# EAGLE board Lilypad_Arduino_USB-Panel-v12 (EAGLE 6.5.0)
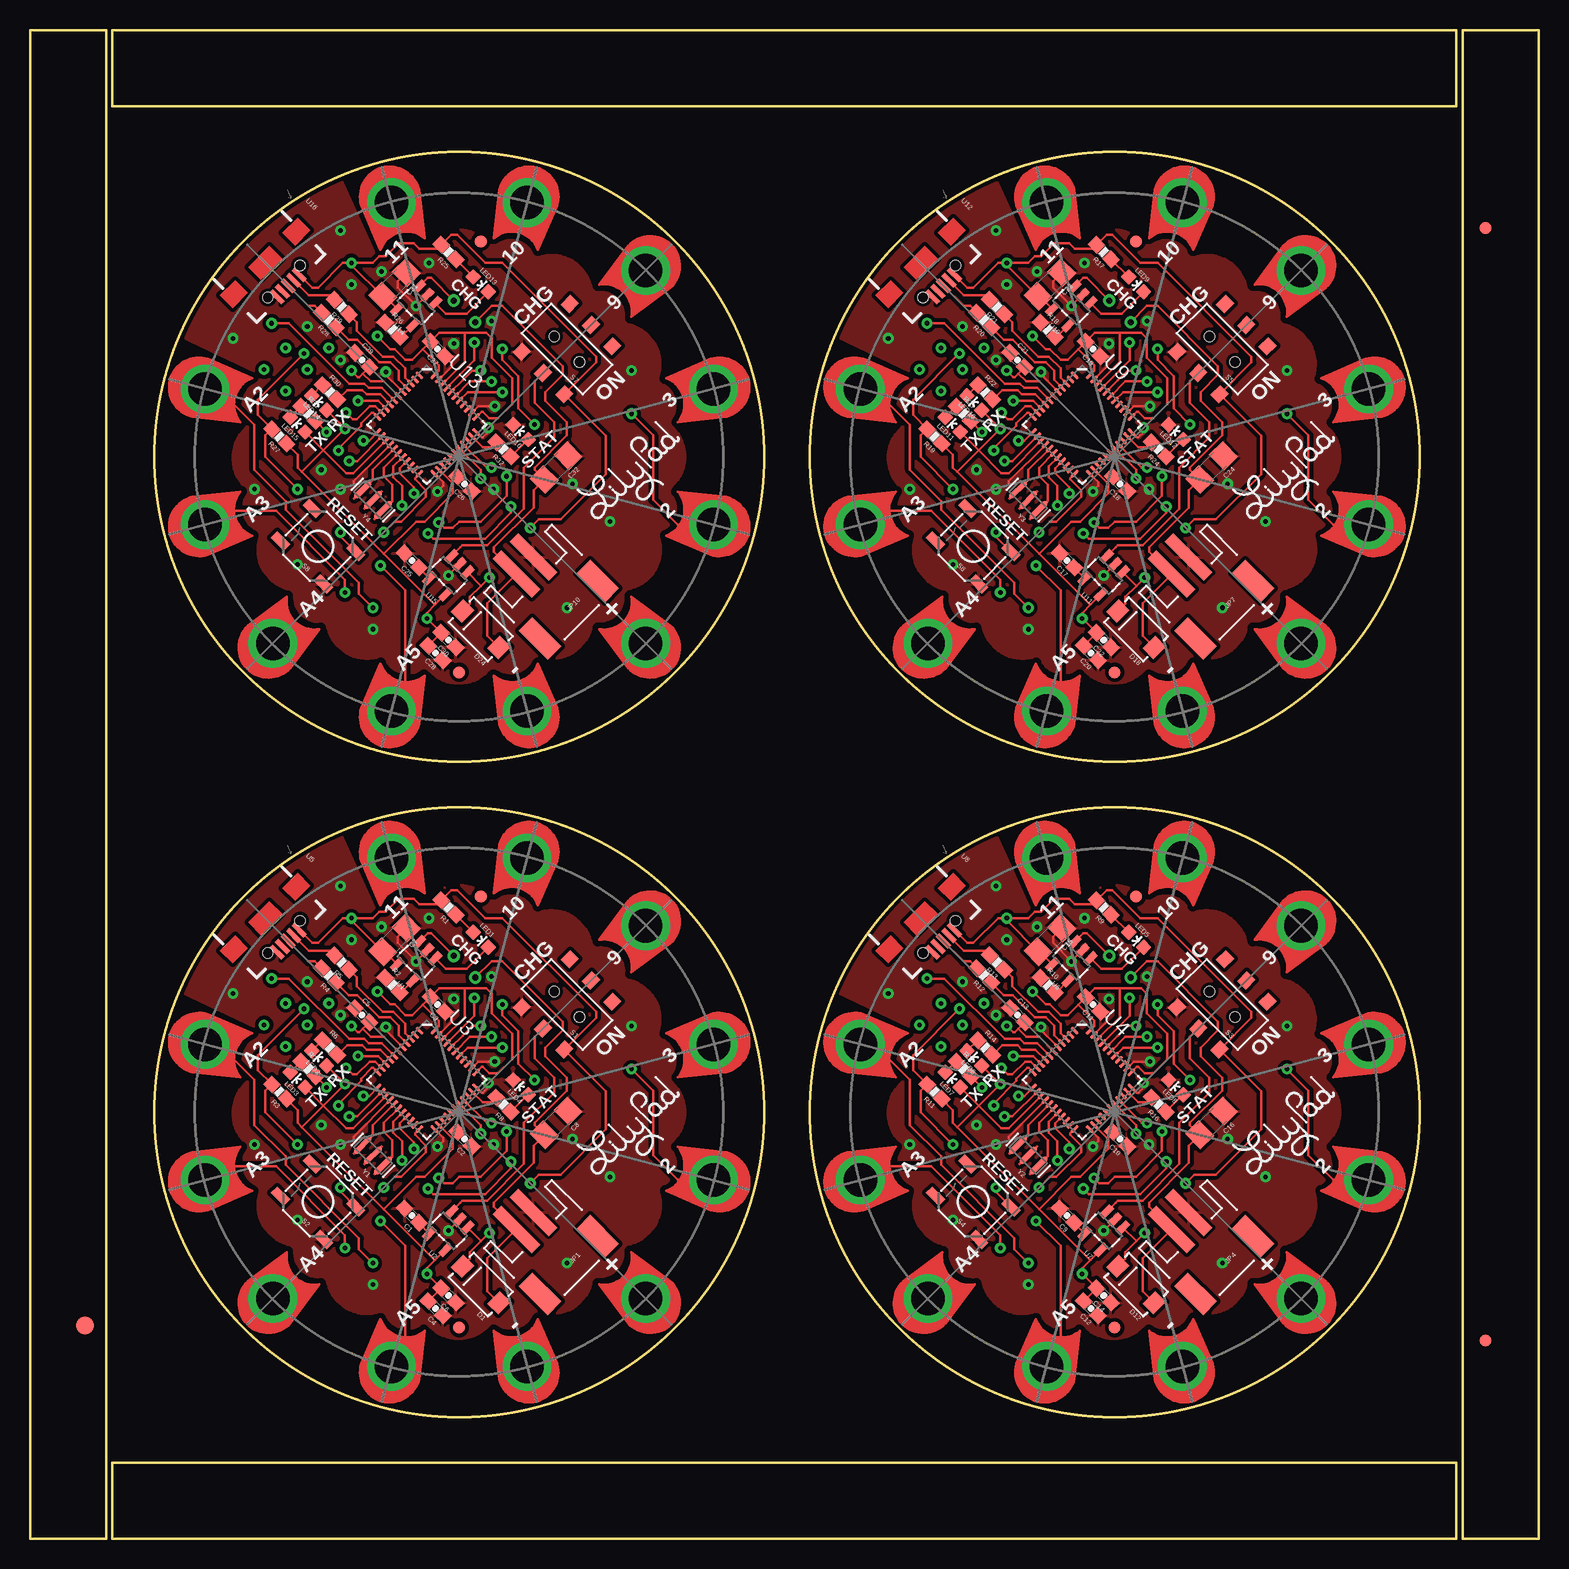
[diagram p0: board, top side]
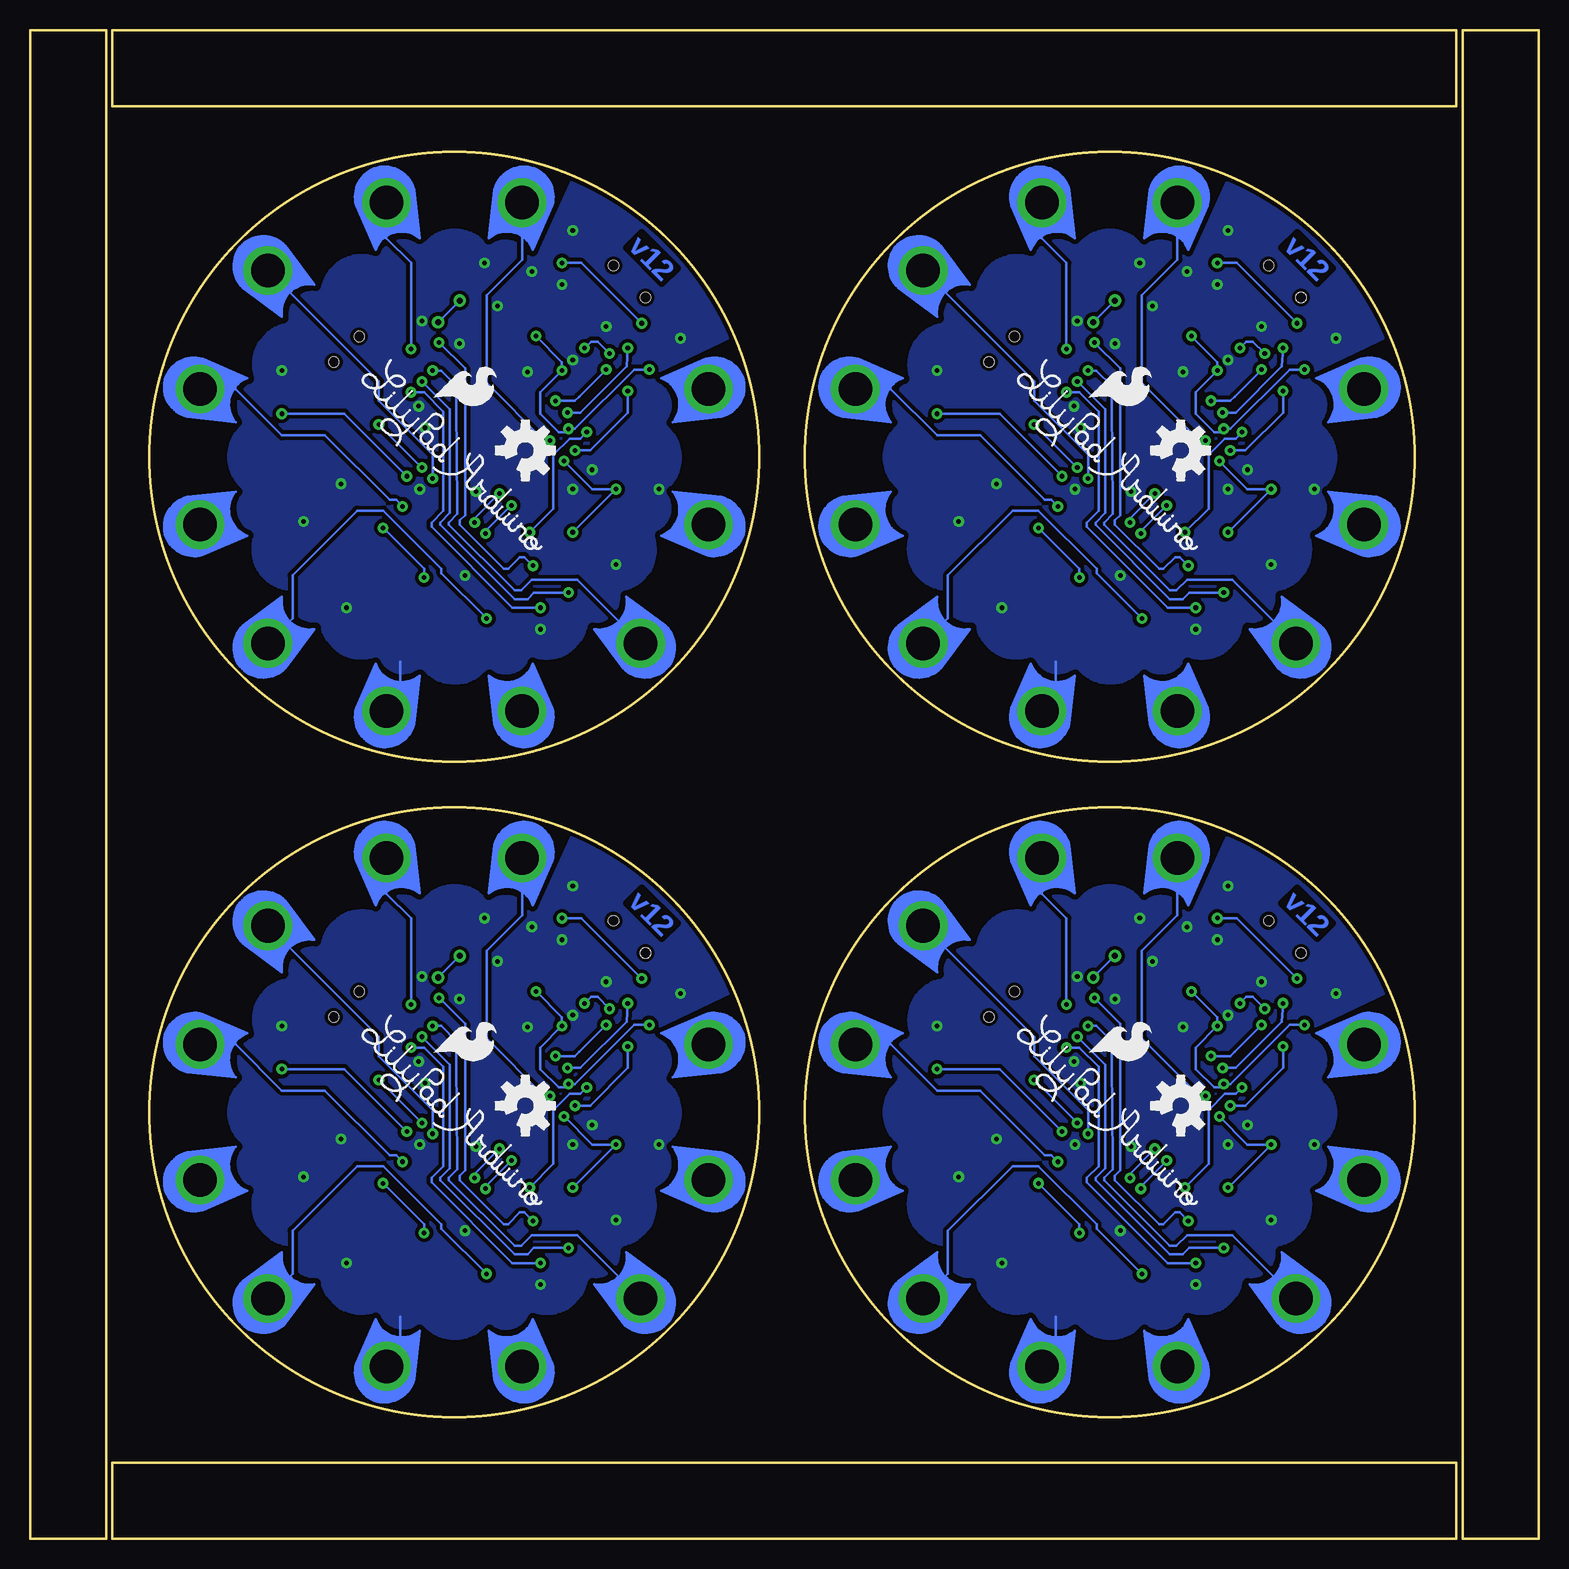
[diagram p1: board, bottom side, seen from below]

Size 125.73 x 125.73 mm. Coordinates in mm from the lower left corner, seen from the top.
Outline: 6.35,0 6.35,125.73 0,125.73 0,0 6.35,0
Outline: 6.86,0 118.87,0 118.87,6.35 6.86,6.35 6.86,0
Outline: 125.73,0 125.73,125.73 119.38,125.73 119.38,0 125.73,0
Outline: 118.87,125.73 6.86,125.73 6.86,119.38 118.87,119.38 118.87,125.73
Outline: circle at 35.77,35.55 radius 25.4
Outline: circle at 90.38,35.55 radius 25.4
Outline: circle at 90.38,90.16 radius 25.4
Outline: circle at 35.77,90.16 radius 25.4
Copper layers (1*16): Top 0.035mm / dielectric 1.5mm / Bottom 0.035mm
Design rules "SparkFun-2-layer": minimum track width 7mil, minimum drill 15mil, track to track 8mil, track to pad 8mil, pad to pad 8mil, via to via 8mil, smd to smd 8mil, copper to edge 8mil, drill to drill 8mil, minimum pad ring 12mil, minimum via ring 10mil, stop-mask expansion 4mil, vias tented up to drill 20mil, thermal gap 10mil
tRestrict: area 10.7,26.1 to 18.6,32.7; area 52.9,38.4 to 60.9,45; area 15.7,15.6 to 24.2,24; area 47.4,47.1 to 55.8,55.5; area 52.9,26 to 60.9,32.6; area 38.7,52.7 to 45.4,60.6; area 26.2,10.5 to 32.9,18.4; area 10.7,38.5 to 18.6,45.1; area 26.3,52.7 to 32.9,60.6; area 38.6,10.5 to 45.2,18.4; area 12.3,20 to 21.5,29; area 10.3,32 to 17.6,39; 84 more areas
bRestrict: area 15.7,15.6 to 24.2,24; area 47.4,47.1 to 55.8,55.5; area 52.9,26 to 60.9,32.6; area 38.7,52.7 to 45.4,60.6; area 26.2,10.5 to 32.9,18.4; area 10.7,38.5 to 18.6,45.1; area 26.3,52.7 to 32.9,60.6; area 38.6,10.5 to 45.2,18.4; area 12.3,20 to 21.5,29; area 10.3,32 to 17.6,39; area 42.3,49.8 to 51.3,59; area 32.3,53.7 to 39.3,61; 72 more areas

## Footprints (pad centres in the part's own frame; a part is rotated, then mirrored left to right if it is on the bottom)
PETAL-LONG-1-2SIDE = drill 2.794 pad 4.064: 1 0.03,0
0603-CAP = smd 1.1 x 1: 1 -0.85,0; 2 0.85,0
1206 = smd 1.6 x 1.8: 1 -1.4,0; 2 1.4,0
SMA-DIODE = smd 1.27 x 1.47: A -2.15,0; C 2.15,0
FIDUCIAL-1.5X3 = smd 1.5 x 1.5: 1 0,0
FIDUCIAL-1X2 = smd 1 x 1: 1 0,0
JST-2-SMD = smd 1 x 4.6: 1 -1,-3.7; 2 1,-3.7 | smd 1.6 x 3.4: NC1 -3.4,1.5; NC2 3.4,1.5
LED-0603 = smd 1 x 1: A 0,-0.877; C 0,0.877
0603-RES = smd 1.1 x 1: 1 -0.85,0; 2 0.85,0
AYZ0202 = smd 1 x 1.15: 1 -2.5,2.825; 2 0,2.825; 3 2.5,2.825; 4 -2.5,-2.825; 5 0,-2.825; 6 2.5,-2.825 | hole 0.85: 1.5,0; -1.5,0
TACTILE_SWITCH_SMD = smd 1.524 x 0.762: 1 -2.54,1.905; 2 2.54,1.905; 3 -2.54,-1.905; 4 2.54,-1.905
SOT23-5 = smd 0.55 x 1.2: 1 -0.95,-1.3; 2 0,-1.3; 3 0.95,-1.3; 4 0.95,1.3; 5 -0.95,1.3
QFN-44-NOPAD_1:1-LESS_PASTE = smd 0.8 x 0.3: 1 -3.337,2.458; 2 -3.337,1.958; 3 -3.337,1.479; 4 -3.337,0.979; 5 -3.337,0.5; 6 -3.337,0; 7 -3.337,-0.5; 8 -3.337,-0.979; 9 -3.337,-1.479; 10 -3.337,-1.958; 11 -3.337,-2.458; 23 3.337,-2.458; 24 3.337,-1.958; 25 3.337,-1.479; 26 3.337,-0.979; 27 3.337,-0.5; 28 3.337,0; 29 3.337,0.5; 30 3.337,0.979; 31 3.337,1.479; 32 3.337,1.958; 33 3.337,2.458 | smd 0.3 x 0.8: 12 -2.458,-3.337; 13 -1.958,-3.337; 14 -1.479,-3.337; 15 -0.979,-3.337; 16 -0.5,-3.337; 17 0,-3.337; 18 0.5,-3.337; 19 0.979,-3.337; 20 1.479,-3.337; 21 1.958,-3.337; 22 2.458,-3.337; 34 2.458,3.337; 35 1.958,3.337; 36 1.479,3.337; 37 0.979,3.337; 38 0.5,3.337; 39 0,3.337; 40 -0.5,3.337; 41 -0.979,3.337; 42 -1.479,3.337; 43 -1.958,3.337; 44 -2.458,3.337
USB-AB-MICRO-SMD_V03 = smd 1.4 x 0.4: D+1 2.7,0; D-1 2.7,0.65; GND1 2.7,-1.3; ID1 2.7,-0.65; VBUS1 2.7,1.3 | hole 0.85: 2.2,1.9; 2.2,-1.9
RESONATOR-SMD = smd 0.45 x 1.905: 1 -1.2,0; 2 0,0; 3 1.2,0

## Placement (x,y rotation side)
+  SEWTAP9  [PETAL-LONG-1-2SIDE]  51.32,19.99 135 top
+1  SEWTAP9  [PETAL-LONG-1-2SIDE]  105.93,19.99 135 top
+2  SEWTAP9  [PETAL-LONG-1-2SIDE]  105.93,74.6 135 top
+3  SEWTAP9  [PETAL-LONG-1-2SIDE]  51.32,74.6 135 top
-  SEWTAP9  [PETAL-LONG-1-2SIDE]  41.42,14.34 105 top
-1  SEWTAP9  [PETAL-LONG-1-2SIDE]  96.03,14.34 105 top
-2  SEWTAP9  [PETAL-LONG-1-2SIDE]  96.03,68.95 105 top
-3  SEWTAP9  [PETAL-LONG-1-2SIDE]  41.42,68.95 105 top
A1  SEWTAP9  [PETAL-LONG-1-2SIDE]  69.16,41.21 345 top
A2  SEWTAP9  [PETAL-LONG-1-2SIDE]  14.55,41.21 345 top
A3  SEWTAP9  [PETAL-LONG-1-2SIDE]  14.55,29.89 15 top
A4  SEWTAP9  [PETAL-LONG-1-2SIDE]  20.21,19.99 45 top
A5  SEWTAP9  [PETAL-LONG-1-2SIDE]  30.11,14.34 75 top
A6  SEWTAP9  [PETAL-LONG-1-2SIDE]  69.16,29.89 15 top
A7  SEWTAP9  [PETAL-LONG-1-2SIDE]  84.72,14.34 75 top
A8  SEWTAP9  [PETAL-LONG-1-2SIDE]  74.82,19.99 45 top
A9  SEWTAP9  [PETAL-LONG-1-2SIDE]  69.16,95.82 345 top
A10  SEWTAP9  [PETAL-LONG-1-2SIDE]  69.16,84.5 15 top
A11  SEWTAP9  [PETAL-LONG-1-2SIDE]  84.72,68.95 75 top
A12  SEWTAP9  [PETAL-LONG-1-2SIDE]  74.82,74.6 45 top
A13  SEWTAP9  [PETAL-LONG-1-2SIDE]  14.55,95.82 345 top
A14  SEWTAP9  [PETAL-LONG-1-2SIDE]  14.55,84.5 15 top
A15  SEWTAP9  [PETAL-LONG-1-2SIDE]  30.11,68.95 75 top
A16  SEWTAP9  [PETAL-LONG-1-2SIDE]  20.21,74.6 45 top
C1  470pF  [0603-CAP]  31.82,26.93 135 top
C2  .1uF  [0603-CAP]  36.22,33.3 135 top
C3  .1uF  [0603-CAP]  33.97,44.53 135 top
C4  .1uF  [0603-CAP]  33.79,19.2 135 top
C5  1uF  [0603-CAP]  27.68,43.63 315 top
C6  4.7uF  [0603-CAP]  34.87,20.28 135 top
C7  4.7uF  [1206]  30.38,49.92 225 top
C8  4.7uF  [1206]  43.85,34.65 225 top
C9  470pF  [0603-CAP]  86.43,26.93 135 top
C10  .1uF  [0603-CAP]  90.83,33.3 135 top
C11  .1uF  [0603-CAP]  88.58,44.53 135 top
C12  .1uF  [0603-CAP]  88.4,19.2 135 top
C13  1uF  [0603-CAP]  82.29,43.63 315 top
C14  4.7uF  [0603-CAP]  89.48,20.28 135 top
C15  4.7uF  [1206]  84.99,49.92 225 top
C16  4.7uF  [1206]  98.46,34.65 225 top
C17  470pF  [0603-CAP]  86.43,81.54 135 top
C18  .1uF  [0603-CAP]  90.83,87.91 135 top
C19  .1uF  [0603-CAP]  88.58,99.14 135 top
C20  .1uF  [0603-CAP]  88.4,73.81 135 top
C21  1uF  [0603-CAP]  82.29,98.24 315 top
C22  4.7uF  [0603-CAP]  89.48,74.89 135 top
C23  4.7uF  [1206]  84.99,104.53 225 top
C24  4.7uF  [1206]  98.46,89.26 225 top
C25  470pF  [0603-CAP]  31.82,81.54 135 top
C26  .1uF  [0603-CAP]  36.22,87.91 135 top
C27  .1uF  [0603-CAP]  33.97,99.14 135 top
C28  .1uF  [0603-CAP]  33.79,73.81 135 top
C29  1uF  [0603-CAP]  27.68,98.24 315 top
C30  4.7uF  [0603-CAP]  34.87,74.89 135 top
C31  4.7uF  [1206]  30.38,104.53 225 top
C32  4.7uF  [1206]  43.85,89.26 225 top
D1  B340A  [SMA-DIODE]  37.56,21.18 135 top
D2  SEWTAP9  [PETAL-LONG-1-2SIDE]  111.59,29.89 165 top
D3  SEWTAP9  [PETAL-LONG-1-2SIDE]  105.93,51.11 225 top
D4  SEWTAP9  [PETAL-LONG-1-2SIDE]  111.59,41.21 195 top
D5  SEWTAP9  [PETAL-LONG-1-2SIDE]  56.98,29.89 165 top
D6  SEWTAP9  [PETAL-LONG-1-2SIDE]  56.98,41.21 195 top
D7  SEWTAP9  [PETAL-LONG-1-2SIDE]  96.03,56.76 255 top
D8  SEWTAP9  [PETAL-LONG-1-2SIDE]  84.72,56.76 285 top
D9  SEWTAP9  [PETAL-LONG-1-2SIDE]  51.32,51.11 225 top
D10  SEWTAP9  [PETAL-LONG-1-2SIDE]  41.42,56.76 255 top
D11  SEWTAP9  [PETAL-LONG-1-2SIDE]  30.11,56.76 285 top
D12  B340A  [SMA-DIODE]  92.17,21.18 135 top
D13  SEWTAP9  [PETAL-LONG-1-2SIDE]  111.59,84.5 165 top
D14  SEWTAP9  [PETAL-LONG-1-2SIDE]  105.93,105.72 225 top
D15  SEWTAP9  [PETAL-LONG-1-2SIDE]  111.59,95.82 195 top
D16  SEWTAP9  [PETAL-LONG-1-2SIDE]  96.03,111.37 255 top
D17  SEWTAP9  [PETAL-LONG-1-2SIDE]  84.72,111.37 285 top
D18  B340A  [SMA-DIODE]  92.17,75.79 135 top
D19  SEWTAP9  [PETAL-LONG-1-2SIDE]  56.98,84.5 165 top
D20  SEWTAP9  [PETAL-LONG-1-2SIDE]  51.32,105.72 225 top
D21  SEWTAP9  [PETAL-LONG-1-2SIDE]  56.98,95.82 195 top
D22  SEWTAP9  [PETAL-LONG-1-2SIDE]  41.42,111.37 255 top
D23  SEWTAP9  [PETAL-LONG-1-2SIDE]  30.11,111.37 285 top
D24  B340A  [SMA-DIODE]  37.56,75.79 135 top
E$1  [FIDUCIAL-1.5X3]  4.57,17.78 0 top
E$3  [FIDUCIAL-1X2]  121.28,16.51 0 top
E$5  [FIDUCIAL-1X2]  121.28,109.22 180 top
JP1  JST-2  [JST-2-SMD]  43.85,23.87 225 top
JP2  FIDUCIAL1X2  [FIDUCIAL-1X2]  35.77,17.59 45 top
JP3  FIDUCIAL1X2  [FIDUCIAL-1X2]  37.56,53.51 45 top
JP4  JST-2  [JST-2-SMD]  98.46,23.87 225 top
JP5  FIDUCIAL1X2  [FIDUCIAL-1X2]  90.38,17.59 45 top
JP6  FIDUCIAL1X2  [FIDUCIAL-1X2]  92.17,53.51 45 top
JP7  JST-2  [JST-2-SMD]  98.46,78.48 225 top
JP8  FIDUCIAL1X2  [FIDUCIAL-1X2]  90.38,72.2 45 top
JP9  FIDUCIAL1X2  [FIDUCIAL-1X2]  92.17,108.12 45 top
JP10  JST-2  [JST-2-SMD]  43.85,78.48 225 top
JP11  FIDUCIAL1X2  [FIDUCIAL-1X2]  35.77,72.2 45 top
JP12  FIDUCIAL1X2  [FIDUCIAL-1X2]  37.56,108.12 45 top
LED1  RED  [LED-0603]  37.56,49.92 225 top
LED2  RED  [LED-0603]  24.09,40.04 45 top
LED3  RED  [LED-0603]  22.3,38.24 45 top
LED4  RED  [LED-0603]  40.89,37.61 45 top
LED5  RED  [LED-0603]  92.17,49.92 225 top
LED6  RED  [LED-0603]  78.7,40.04 45 top
LED7  RED  [LED-0603]  76.91,38.24 45 top
LED8  RED  [LED-0603]  95.5,37.61 45 top
LED9  RED  [LED-0603]  92.17,104.53 225 top
LED10  RED  [LED-0603]  78.7,94.65 45 top
LED11  RED  [LED-0603]  76.91,92.85 45 top
LED12  RED  [LED-0603]  95.5,92.22 45 top
LED13  RED  [LED-0603]  37.56,104.53 225 top
LED14  RED  [LED-0603]  24.09,94.65 45 top
LED15  RED  [LED-0603]  22.3,92.85 45 top
LED16  RED  [LED-0603]  40.89,92.22 45 top
R1  330  [0603-RES]  34.87,52.61 135 top
R2  10k  [0603-RES]  30.2,46.15 315 top
R3  10k  [0603-RES]  20.77,37.26 135 top
R4  22  [0603-RES]  24.9,46.95 135 top
R5  22  [0603-RES]  25.98,48.03 135 top
R6  330  [0603-RES]  24.99,40.94 315 top
R7  330  [0603-RES]  23.19,39.14 315 top
R8  330  [0603-RES]  39.45,36.18 135 top
R9  330  [0603-RES]  89.48,52.61 135 top
R10  10k  [0603-RES]  84.81,46.15 315 top
R11  10k  [0603-RES]  75.38,37.26 135 top
R12  22  [0603-RES]  79.51,46.95 135 top
R13  22  [0603-RES]  80.59,48.03 135 top
R14  330  [0603-RES]  79.6,40.94 315 top
R15  330  [0603-RES]  77.8,39.14 315 top
R16  330  [0603-RES]  94.06,36.18 135 top
R17  330  [0603-RES]  89.48,107.22 135 top
R18  10k  [0603-RES]  84.81,100.76 315 top
R19  10k  [0603-RES]  75.38,91.87 135 top
R20  22  [0603-RES]  79.51,101.56 135 top
R21  22  [0603-RES]  80.59,102.64 135 top
R22  330  [0603-RES]  79.6,95.55 315 top
R23  330  [0603-RES]  77.8,93.75 315 top
R24  330  [0603-RES]  94.06,90.79 135 top
R25  330  [0603-RES]  34.87,107.22 135 top
R26  10k  [0603-RES]  30.2,100.76 315 top
R27  10k  [0603-RES]  20.77,91.87 135 top
R28  22  [0603-RES]  24.9,101.56 135 top
R29  22  [0603-RES]  25.98,102.64 135 top
R30  330  [0603-RES]  24.99,95.55 315 top
R31  330  [0603-RES]  23.19,93.75 315 top
R32  330  [0603-RES]  39.45,90.79 135 top
S1  [AYZ0202]  44.75,44.53 135 top
S2  !RESET  [TACTILE_SWITCH_SMD]  24,28.1 135 top
S3  [AYZ0202]  99.36,44.53 135 top
S4  !RESET  [TACTILE_SWITCH_SMD]  78.61,28.1 135 top
S5  [AYZ0202]  99.36,99.14 135 top
S6  !RESET  [TACTILE_SWITCH_SMD]  78.61,82.71 135 top
S7  [AYZ0202]  44.75,99.14 135 top
S8  !RESET  [TACTILE_SWITCH_SMD]  24,82.71 135 top
U1  MCP73831  [SOT23-5]  32.17,48.12 135 top
U2  MIC5219  [SOT23-5]  34.87,25.67 135 top
U3  ATMEGA32U41:1-LESS_PASTE  [QFN-44-NOPAD_1:1-LESS_PASTE]  33.07,38.24 315 top
U4  ATMEGA32U41:1-LESS_PASTE  [QFN-44-NOPAD_1:1-LESS_PASTE]  87.68,38.24 315 top
U5  [USB-AB-MICRO-SMD_V03]  19.6,51.71 315 top
U6  MCP73831  [SOT23-5]  86.78,48.12 135 top
U7  MIC5219  [SOT23-5]  89.48,25.67 135 top
U8  [USB-AB-MICRO-SMD_V03]  74.21,51.71 315 top
U9  ATMEGA32U41:1-LESS_PASTE  [QFN-44-NOPAD_1:1-LESS_PASTE]  87.68,92.85 315 top
U10  MCP73831  [SOT23-5]  86.78,102.73 135 top
U11  MIC5219  [SOT23-5]  89.48,80.28 135 top
U12  [USB-AB-MICRO-SMD_V03]  74.21,106.32 315 top
U13  ATMEGA32U41:1-LESS_PASTE  [QFN-44-NOPAD_1:1-LESS_PASTE]  33.07,92.85 315 top
U14  MCP73831  [SOT23-5]  32.17,102.73 135 top
U15  MIC5219  [SOT23-5]  34.87,80.28 135 top
U16  [USB-AB-MICRO-SMD_V03]  19.6,106.32 315 top
U$1  LOGO-LPLPA  [LOGO-LPA]  35.77,35.55 315 bottom
U$2  LOGO-LPLP  [LOGO-LILYPAD]  104.66,34.38 45 top
U$3  LOGO-LPLPA  [LOGO-LPA]  90.38,35.55 315 bottom
U$4  OSHW-LOGOM  [OSHW-LOGO-M]  84.45,36.09 315 bottom
U$5  OSHW-LOGOM  [OSHW-LOGO-M]  29.84,36.09 315 bottom
U$6  [SFE_LOGO_FLAME_.2]  92.53,40.58 315 bottom
U$7  [SFE_LOGO_FLAME_.2]  37.92,40.58 315 bottom
U$8  LOGO-LPLP  [LOGO-LILYPAD]  104.66,88.99 45 top
U$9  LOGO-LPLPA  [LOGO-LPA]  90.38,90.16 315 bottom
U$10  OSHW-LOGOM  [OSHW-LOGO-M]  84.45,90.7 315 bottom
U$11  [SFE_LOGO_FLAME_.2]  92.53,95.19 315 bottom
U$12  LOGO-LPLP  [LOGO-LILYPAD]  50.05,88.99 45 top
U$13  LOGO-LPLP  [LOGO-LILYPAD]  50.05,34.38 45 top
U$14  LOGO-LPLPA  [LOGO-LPA]  35.77,90.16 315 bottom
U$15  OSHW-LOGOM  [OSHW-LOGO-M]  29.84,90.7 315 bottom
U$16  [SFE_LOGO_FLAME_.2]  37.92,95.19 315 bottom
Y1  8MHz  [RESONATOR-SMD]  28.58,31.96 135 top
Y2  8MHz  [RESONATOR-SMD]  83.19,31.96 135 top
Y3  8MHz  [RESONATOR-SMD]  83.19,86.57 135 top
Y4  8MHz  [RESONATOR-SMD]  28.58,86.57 135 top

## Library data of the parts
+ +1-+3 - -1--3 A1-A16 D2-D11 D13-D17 D19-D23 U$2 U$8 U$12 U$13 = LilyPad-Wearables; NO_PART: 1
C1 C9 C17 C25 = SparkFun-Passives; PROD_ID: CAP-07884
C2-C4 C10-C12 C18-C20 C26-C28 = SparkFun-Passives; PROD_ID: CAP-00810
C5 C13 C21 C29 = SparkFun-Passives; PROD_ID: CAP-00868
C6 C14 C22 C30 = SparkFun-Passives; PROD_ID: CAP-08280
C7 C8 C15 C16 C23 C24 C31 C32 = SparkFun-Passives; PROD_ID: CAP-10300
D1 D12 D18 D24 = SparkFun-DiscreteSemi; PROD_ID: DIO-09886
E$1 = SparkFun-Retired
E$3 E$5 U$6 U$7 U$11 U$16 = SparkFun-Aesthetics
JP1 JP4 JP7 JP10 = SparkFun-Connectors; PROD_ID: CONN-08352
JP2 JP3 JP5 JP6 JP8 JP9 JP11 JP12 U$4 U$5 U$10 U$15 = SparkFun
LED1-LED16 = SparkFun-LED; PROD_ID: DIO-00819
R1 R7-R9 R15-R17 R23-R25 R31 R32 = SparkFun-Passives; PROD_ID: RES-00818
R2 R3 R10 R11 R18 R19 R26 R27 = SparkFun-Resistors; PROD_ID: RES-00824
R4 R5 R12 R13 R20 R21 R28 R29 = SparkFun-Resistors; PROD_ID: RES-08698
R6 R14 R22 R30 = SparkFun-Resistors; PROD_ID: RES-00818
S1 S3 S5 S7 = SparkFun-Electromechanical; PROD_ID: SWCH-08179
S2 S4 S6 S8 = SparkFun-Electromechanical; PROD_ID: SWCH-08247
U1 U6 U10 U14 = SparkFun-PowerIC; PROD_ID: IC-09995
U2 U7 U11 U15 = SparkFun-PowerIC; PROD_ID: VREG-09872
U3 U4 U9 U13 = Testing; PROD_ID: IC-10828
U5 U8 U12 U16 = SparkFun-Connectors; PROD_ID: CONN-11794
U$1 U$3 U$9 U$14 = LilyPad-Wearables
Y1-Y4 = SparkFun-FreqCtrl; PROD_ID: XTAL-08895

## Nets
3.3V: +.1 C2.2 C3.2 C4.2 C5.2 C6.2 LED2.A LED3.A R3.1 U2.5 U3.6 U3.14 U3.24 U3.34 U3.42 U3.44
3.3V1: +1.1 C10.2 C11.2 C12.2 C13.2 C14.2 LED6.A LED7.A R11.1 U4.6 U4.14 U4.24 U4.34 U4.42 U4.44 U7.5
3.3V2: +2.1 C18.2 C19.2 C20.2 C21.2 C22.2 LED10.A LED11.A R19.1 U9.6 U9.14 U9.24 U9.34 U9.42 U9.44 U11.5
3.3V3: +3.1 C26.2 C27.2 C28.2 C29.2 C30.2 LED14.A LED15.A R27.1 U13.6 U13.14 U13.24 U13.34 U13.42 U13.44 U15.5
5V: C7.2 D1.C R1.2 S1.1 U1.4 U2.1 U3.7 U5.VBUS1
5V1: C15.2 D12.C R9.2 S3.1 U4.7 U6.4 U7.1 U8.VBUS1
5V2: C23.2 D18.C R17.2 S5.1 U9.7 U10.4 U11.1 U12.VBUS1
5V3: C31.2 D24.C R25.2 S7.1 U13.7 U14.4 U15.1 U16.VBUS1
D+: R4.1 U3.4
D+1: R12.1 U4.4
D+2: R20.1 U9.4
D+3: R28.1 U13.4
D-: R5.1 U3.3
D-1: R13.1 U4.3
D-2: R21.1 U9.3
D-3: R29.1 U13.3
GND: -.1 C1.2 C2.1 C3.1 C4.1 C5.1 C6.1 C7.1 C8.1 JP1.1 LED4.C R2.1 S1.3 S2.1 U1.2 U2.2 U3.5 U3.15 U3.23 U3.33 U3.35 U3.43 U5.GND1 Y1.2
GND1: -1.1 C9.2 C10.1 C11.1 C12.1 C13.1 C14.1 C15.1 C16.1 JP4.1 LED8.C R10.1 S3.3 S4.1 U4.5 U4.15 U4.23 U4.33 U4.35 U4.43 U6.2 U7.2 U8.GND1 Y2.2
GND2: -2.1 C17.2 C18.1 C19.1 C20.1 C21.1 C22.1 C23.1 C24.1 JP7.1 LED12.C R18.1 S5.3 S6.1 U9.5 U9.15 U9.23 U9.33 U9.35 U9.43 U10.2 U11.2 U12.GND1 Y3.2
GND3: -3.1 C25.2 C26.1 C27.1 C28.1 C29.1 C30.1 C31.1 C32.1 JP10.1 LED16.C R26.1 S7.3 S8.1 U13.5 U13.15 U13.23 U13.33 U13.35 U13.43 U14.2 U15.2 U16.GND1 Y4.2
MISO: U3.11
MISO1: U4.11
MISO2: U9.11
MISO3: U13.11
MOSI: U3.10
MOSI1: U4.10
MOSI2: U9.10
MOSI3: U13.10
N$1: LED2.C R6.1
N$2: S1.2 U2.3
N$3: LED1.A R1.1
N$4: LED1.C U1.1
N$5: U3.17 Y1.1
N$6: R2.2 U1.5
N$7: U3.16 Y1.3
N$8: C1.1 U2.4
N$9: D11.1 U3.12
N$10: D10.1 U3.30
N$11: D9.1 U3.29
N$12: D5.1 U3.19
N$13: D6.1 U3.18
N$14: A5.1 U3.41
N$15: A4.1 U3.40
N$16: A3.1 U3.39
N$17: A2.1 U3.38
N$18: LED4.A R8.1
N$19: R5.2 U5.D-1
N$20: R4.2 U5.D+1
N$21: LED3.C R7.1
N$22: S3.2 U7.3
N$23: LED5.A R9.1
N$24: LED5.C U6.1
N$25: R10.2 U6.5
N$26: C9.1 U7.4
N$27: D8.1 U4.12
N$28: D7.1 U4.30
N$29: D3.1 U4.29
N$30: A7.1 U4.41
N$31: A8.1 U4.40
N$32: A6.1 U4.39
N$33: A1.1 U4.38
N$34: R13.2 U8.D-1
N$35: R12.2 U8.D+1
N$36: LED6.C R14.1
N$37: LED7.C R15.1
N$38: U4.17 Y2.1
N$39: U4.16 Y2.3
N$40: D2.1 U4.19
N$41: D4.1 U4.18
N$42: LED8.A R16.1
N$43: S5.2 U11.3
N$44: LED9.A R17.1
N$45: LED9.C U10.1
N$46: R18.2 U10.5
N$47: C17.1 U11.4
N$48: D17.1 U9.12
N$49: D16.1 U9.30
N$50: D14.1 U9.29
N$51: A11.1 U9.41
N$52: A12.1 U9.40
N$53: A10.1 U9.39
N$54: A9.1 U9.38
N$55: R21.2 U12.D-1
N$56: R20.2 U12.D+1
N$57: LED10.C R22.1
N$58: LED11.C R23.1
N$59: U9.17 Y3.1
N$60: U9.16 Y3.3
N$61: D13.1 U9.19
N$62: D15.1 U9.18
N$63: LED12.A R24.1
N$64: S7.2 U15.3
N$65: LED13.A R25.1
N$66: LED13.C U14.1
N$67: R26.2 U14.5
N$68: C25.1 U15.4
N$69: D23.1 U13.12
N$70: D22.1 U13.30
N$71: D20.1 U13.29
N$72: A15.1 U13.41
N$73: A16.1 U13.40
N$74: A14.1 U13.39
N$75: A13.1 U13.38
N$76: R29.2 U16.D-1
N$77: R28.2 U16.D+1
N$78: LED14.C R30.1
N$79: LED15.C R31.1
N$80: U13.17 Y4.1
N$81: U13.16 Y4.3
N$82: D19.1 U13.19
N$83: D21.1 U13.18
N$84: LED16.A R32.1
RESET: R3.2 S2.3 U3.13
RESET1: R11.2 S4.3 U4.13
RESET2: R19.2 S6.3 U9.13
RESET3: R27.2 S8.3 U13.13
RX_LED: R6.2 U3.8
RX_LED1: R14.2 U4.8
RX_LED2: R22.2 U9.8
RX_LED3: R30.2 U13.8
SCK: U3.9
SCK1: U4.9
SCK2: U9.9
SCK3: U13.9
TX_LED: R7.2 U3.22
TX_LED1: R15.2 U4.22
TX_LED2: R23.2 U9.22
TX_LED3: R31.2 U13.22
USER_LED: R8.2 U3.32
USER_LED1: R16.2 U4.32
USER_LED2: R24.2 U9.32
USER_LED3: R32.2 U13.32
V_BATT: C8.2 D1.A JP1.2 U1.3
V_BATT1: C16.2 D12.A JP4.2 U6.3
V_BATT2: C24.2 D18.A JP7.2 U10.3
V_BATT3: C32.2 D24.A JP10.2 U14.3

## Tracks (layer width: path | path; a pad name or v marks a point on that pad's centre or on a via)
3.3V  (via drill 0.38)
  Top 0.203: 34.42,23.88 U2.5 33.79,23.25 | LED2.A 25.8,38.33 v26.25,37.88 24.45,36.09 | 33.79,23.25 33.7,23.25 29.48,27.47 | 33.79,23.25 33.07,22.53 v33.07,22.08 C6.2 C4.2 | R3.1 22.3,35.73 22.3,34.65 22.66,34.29 | 32.74,44.5 C3.2 34.12,45.88 36.22,45.88 | U3.44 34.06,42.71 34.06,43.18 32.74,44.5 | 29.48,27.47 32.17,30.16 32.89,30.16 35.23,32.5 35.23,33.32 35.13,33.42 | U3.24 35.13,33.42 | C2.2 35.13,33.42 | 27.75,42.49 27.45,42.19 27.33,42.19 v26.79,42.73 | U3.6 29.48,41.84 28.4,41.84 27.75,42.49 | 27.75,42.49 C5.2 | v28.94,45.61 30.02,44.53 30.38,44.53 31.28,43.63 31.87,43.63 32.74,44.5 | U3.34 37.63,39.32 37.74,39.32 38.28,38.78 39,38.78 40.17,39.95 40.17,42.1 38.46,43.81 38.46,45.43 38.01,45.88 36.22,45.88 | U3.42 36.22,43.48 36.22,45.88 | U3.14 26.94,34.2 26.34,34.2 24.45,36.09 | 22.66,34.29 24.45,36.09 | 24.45,36.09 | 24.45,36.09 | LED3.A 24.45,36.09 | 24.45,36.09 | 22.66,34.29 | 22.66,34.29 29.48,27.47
  Bottom 0.203: v19.51,42.82 20.77,42.82 25.71,37.88 v26.25,37.88 | v33.07,22.08 36.84,25.85 36.84,26.21 41.69,31.06 43.85,31.06 49.24,25.67 49.24,22.08 +.1 | v26.25,37.88 | v26.25,37.88 26.52,37.62 27.06,37.62 28.58,39.14 28.58,40.94 v26.79,42.73 26.79,43.45 v28.94,45.61
3.3V1  (via drill 0.38)
  Top 0.203: 89.03,23.88 U7.5 88.4,23.25 | LED6.A 80.41,38.33 v80.86,37.88 79.06,36.09 | 88.4,23.25 88.31,23.25 84.09,27.47 | 88.4,23.25 87.68,22.53 v87.68,22.08 C14.2 C12.2 | R11.1 76.91,35.73 76.91,34.65 77.27,34.29 | 87.35,44.5 C11.2 88.73,45.88 90.83,45.88 | U4.44 88.67,42.71 88.67,43.18 87.35,44.5 | 84.09,27.47 86.78,30.16 87.5,30.16 89.84,32.5 89.84,33.32 89.74,33.42 | U4.24 89.74,33.42 | C10.2 89.74,33.42 | 82.36,42.49 82.06,42.19 81.94,42.19 v81.4,42.73 | U4.6 84.09,41.84 83.01,41.84 82.36,42.49 | 82.36,42.49 C13.2 | v83.55,45.61 84.63,44.53 84.99,44.53 85.89,43.63 86.48,43.63 87.35,44.5 | U4.34 92.24,39.32 92.35,39.32 92.89,38.78 93.61,38.78 94.78,39.95 94.78,42.1 93.07,43.81 93.07,45.43 92.62,45.88 90.83,45.88 | U4.42 90.83,43.48 90.83,45.88 | U4.14 81.55,34.2 80.95,34.2 79.06,36.09 | 77.27,34.29 79.06,36.09 | 79.06,36.09 | 79.06,36.09 | LED7.A 79.06,36.09 | 79.06,36.09 | 77.27,34.29 | 77.27,34.29 84.09,27.47
  Bottom 0.203: v74.12,42.82 75.38,42.82 80.32,37.88 v80.86,37.88 | v87.68,22.08 91.45,25.85 91.45,26.21 96.3,31.06 98.46,31.06 103.85,25.67 103.85,22.08 +1.1 | v80.86,37.88 | v80.86,37.88 81.13,37.62 81.67,37.62 83.19,39.14 83.19,40.94 v81.4,42.73 81.4,43.45 v83.55,45.61
3.3V2  (via drill 0.38)
  Top 0.203: 89.03,78.48 U11.5 88.4,77.86 | LED10.A 80.41,92.94 v80.86,92.49 79.06,90.7 | 88.4,77.86 88.31,77.86 84.09,82.08 | 88.4,77.86 87.68,77.14 v87.68,76.69 C22.2 C20.2 | R19.1 76.91,90.34 76.91,89.26 77.27,88.9 | 87.35,99.11 C19.2 88.73,100.49 90.83,100.49 | U9.44 88.67,97.32 88.67,97.79 87.35,99.11 | 84.09,82.08 86.78,84.77 87.5,84.77 89.84,87.11 89.84,87.93 89.74,88.03 | U9.24 89.74,88.03 | C18.2 89.74,88.03 | 82.36,97.1 82.06,96.8 81.94,96.8 v81.4,97.34 | U9.6 84.09,96.44 83.01,96.44 82.36,97.1 | 82.36,97.1 C21.2 | v83.55,100.22 84.63,99.14 84.99,99.14 85.89,98.24 86.48,98.24 87.35,99.11 | U9.34 92.24,93.93 92.35,93.93 92.89,93.39 93.61,93.39 94.78,94.56 94.78,96.72 93.07,98.42 93.07,100.04 92.62,100.49 90.83,100.49 | U9.42 90.83,98.09 90.83,100.49 | U9.14 81.55,88.81 80.95,88.81 79.06,90.7 | 77.27,88.9 79.06,90.7 | 79.06,90.7 | 79.06,90.7 | LED11.A 79.06,90.7 | 79.06,90.7 | 77.27,88.9 | 77.27,88.9 84.09,82.08
  Bottom 0.203: v74.12,97.43 75.38,97.43 80.32,92.49 v80.86,92.49 | v87.68,76.69 91.45,80.46 91.45,80.82 96.3,85.67 98.46,85.67 103.85,80.28 103.85,76.69 +2.1 | v80.86,92.49 | v80.86,92.49 81.13,92.22 81.67,92.22 83.19,93.75 83.19,95.55 v81.4,97.34 81.4,98.06 v83.55,100.22
3.3V3  (via drill 0.38)
  Top 0.203: 34.42,78.48 U15.5 33.79,77.86 | LED14.A 25.8,92.94 v26.25,92.49 24.45,90.7 | 33.79,77.86 33.7,77.86 29.48,82.08 | 33.79,77.86 33.07,77.14 v33.07,76.69 C30.2 C28.2 | R27.1 22.3,90.34 22.3,89.26 22.66,88.9 | 32.74,99.11 C27.2 34.12,100.49 36.22,100.49 | U13.44 34.06,97.32 34.06,97.79 32.74,99.11 | 29.48,82.08 32.17,84.77 32.89,84.77 35.23,87.11 35.23,87.93 35.13,88.03 | U13.24 35.13,88.03 | C26.2 35.13,88.03 | 27.75,97.1 27.45,96.8 27.33,96.8 v26.79,97.34 | U13.6 29.48,96.44 28.4,96.44 27.75,97.1 | 27.75,97.1 C29.2 | v28.94,100.22 30.02,99.14 30.38,99.14 31.28,98.24 31.87,98.24 32.74,99.11 | U13.34 37.63,93.93 37.74,93.93 38.28,93.39 39,93.39 40.17,94.56 40.17,96.72 38.46,98.42 38.46,100.04 38.01,100.49 36.22,100.49 | U13.42 36.22,98.09 36.22,100.49 | U13.14 26.94,88.81 26.34,88.81 24.45,90.7 | 22.66,88.9 24.45,90.7 | 24.45,90.7 | 24.45,90.7 | LED15.A 24.45,90.7 | 24.45,90.7 | 22.66,88.9 | 22.66,88.9 29.48,82.08
  Bottom 0.203: v19.51,97.43 20.77,97.43 25.71,92.49 v26.25,92.49 | v33.07,76.69 36.84,80.46 36.84,80.82 41.69,85.67 43.85,85.67 49.24,80.28 49.24,76.69 +3.1 | v26.25,92.49 | v26.25,92.49 26.52,92.22 27.06,92.22 28.58,93.75 28.58,95.55 v26.79,97.34 26.79,98.06 v28.94,100.22
5V  (via drill 0.38)
  Top 0.203: U3.7 29.31,41.3 28.22,41.3 27.86,41.66 26.61,41.66 21.58,46.69 v20.14,46.69 | v41.69,29.62 42.41,30.34 44.21,30.34 47.98,34.11 47.98,37.3 S1.1 47.17,43.42 47.17,43.9 39.36,51.71 37.92,51.71 35.59,54.05 35.1,54.05 R1.2 33.94,52.88 32.44,52.88 32,53.33 30.74,53.33 29.66,52.25 29.12,52.25 28.58,51.71 v26.79,51.71 | v26.79,51.71 26.07,51.71 24,49.65 23.51,49.65 U5.VBUS1 | v26.79,51.71 26.79,51.53 C7.2 29.53,48.93 U1.4 | 37.56,24.77 36.66,23.88 36.66,23.32 D1.C | 37.56,24.77 v38.28,25.49 | v38.28,25.49 | U2.1 37.56,24.82 37.56,24.77
  Bottom 0.203: v20.14,46.69 25.17,51.71 v26.79,51.71 | v41.69,29.62 38.28,26.21 v38.28,25.49
5V1  (via drill 0.38)
  Top 0.203: U4.7 83.92,41.3 82.83,41.3 82.47,41.66 81.22,41.66 76.19,46.69 v74.75,46.69 | v96.3,29.62 97.02,30.34 98.82,30.34 102.59,34.11 102.59,37.3 S3.1 101.78,43.42 101.78,43.9 93.97,51.71 92.53,51.71 90.2,54.05 89.71,54.05 R9.2 88.55,52.88 87.05,52.88 86.61,53.33 85.35,53.33 84.27,52.25 83.73,52.25 83.19,51.71 v81.4,51.71 | v81.4,51.71 80.68,51.71 78.61,49.65 78.12,49.65 U8.VBUS1 | v81.4,51.71 81.4,51.53 C15.2 84.14,48.93 U6.4 | 92.17,24.77 91.28,23.88 91.28,23.32 D12.C | 92.17,24.77 v92.89,25.49 | v92.89,25.49 | U7.1 92.17,24.82 92.17,24.77
  Bottom 0.203: v74.75,46.69 79.78,51.71 v81.4,51.71 | v96.3,29.62 92.89,26.21 v92.89,25.49
5V2  (via drill 0.38)
  Top 0.203: U9.7 83.92,95.91 82.83,95.91 82.47,96.27 81.22,96.27 76.19,101.3 v74.75,101.3 | v96.3,84.23 97.02,84.95 98.82,84.95 102.59,88.72 102.59,91.91 S5.1 101.78,98.03 101.78,98.51 93.97,106.32 92.53,106.32 90.2,108.66 89.71,108.66 R17.2 88.55,107.49 87.05,107.49 86.61,107.94 85.35,107.94 84.27,106.86 83.73,106.86 83.19,106.32 v81.4,106.32 | v81.4,106.32 80.68,106.32 78.61,104.26 78.12,104.26 U12.VBUS1 | v81.4,106.32 81.4,106.14 C23.2 84.14,103.54 U10.4 | 92.17,79.38 91.28,78.48 91.28,77.93 D18.C | 92.17,79.38 v92.89,80.1 | v92.89,80.1 | U11.1 92.17,79.42 92.17,79.38
  Bottom 0.203: v74.75,101.3 79.78,106.32 v81.4,106.32 | v96.3,84.23 92.89,80.82 v92.89,80.1
5V3  (via drill 0.38)
  Top 0.203: U13.7 29.31,95.91 28.22,95.91 27.86,96.27 26.61,96.27 21.58,101.3 v20.14,101.3 | v41.69,84.23 42.41,84.95 44.21,84.95 47.98,88.72 47.98,91.91 S7.1 47.17,98.03 47.17,98.51 39.36,106.32 37.92,106.32 35.59,108.66 35.1,108.66 R25.2 33.94,107.49 32.44,107.49 32,107.94 30.74,107.94 29.66,106.86 29.12,106.86 28.58,106.32 v26.79,106.32 | v26.79,106.32 26.07,106.32 24,104.26 23.51,104.26 U16.VBUS1 | v26.79,106.32 26.79,106.14 C31.2 29.53,103.54 U14.4 | 37.56,79.38 36.66,78.48 36.66,77.93 D24.C | 37.56,79.38 v38.28,80.1 | v38.28,80.1 | U15.1 37.56,79.42 37.56,79.38
  Bottom 0.203: v20.14,101.3 25.17,106.32 v26.79,106.32 | v41.69,84.23 38.28,80.82 v38.28,80.1
D+
  Top 0.203: R4.1 26.55,45.3 27.27,45.3 29.12,43.45 30.02,43.45 30.74,42.73 30.74,41.96 U3.4
D+1
  Top 0.203: R12.1 81.17,45.3 81.88,45.3 83.73,43.45 84.63,43.45 85.35,42.73 85.35,41.96 U4.4
D+2
  Top 0.203: R20.1 81.17,99.91 81.88,99.91 83.73,98.06 84.63,98.06 85.35,97.34 85.35,96.57 U9.4
D+3
  Top 0.203: R28.1 26.55,99.91 27.27,99.91 29.12,98.06 30.02,98.06 30.74,97.34 30.74,96.57 U13.4
D-
  Top 0.203: R5.1 27.24,46.77 27.24,46.06 29.39,43.9 30.29,43.9 31.28,42.91 31.28,42.13 U3.3
D-1
  Top 0.203: R13.1 81.85,46.77 81.85,46.06 84,43.9 84.9,43.9 85.89,42.91 85.89,42.13 U4.3
D-2
  Top 0.203: R21.1 81.85,101.38 81.85,100.67 84,98.51 84.9,98.51 85.89,97.52 85.89,96.74 U9.3
D-3
  Top 0.203: R29.1 27.24,101.38 27.24,100.67 29.39,98.51 30.29,98.51 31.28,97.52 31.28,96.74 U13.3
GND  (via drill 0.38)
  Top 0.203: U1.2 v32.17,48.12 30.65,49.65 30.65,50.19 C7.1 | U2.2 v34.87,25.67 | C3.1 35.14,43.36 35.14,43.08 U3.43 | U3.15 26.97,33.52 26.97,33.39 | U3.23 34.42,33.42 34.42,33.12 v33.97,32.67 | U3.5 29.65,42.37 v29.65,42.63 | U3.33 37.63,37.16 37.74,37.16 38.19,37.62 v38.19,37.97 | U3.35 37.37,39.77 v38.73,39.77
  Bottom 0.203: -.1 40.26,15.52 40.26,18.49
  other vias: 23.1,46.42 44.75,22.98 48.34,30.16 28.58,21.18 26.79,49.92 22.3,26.57 25.89,43.63 29.3,51 16.91,45.43 25.89,32.85 24.27,34.47 38.46,46.86 35.32,44.98 38.64,32.85 45.2,33.3 33.25,51.71 18.7,32.85 25.89,54.41 50.14,42.73
  pour Top (isolate 0.305): 53.73,53.51 arc90 17.81,53.51 arc90 17.81,17.59 arc90 53.73,17.59 arc90
  pour Bottom (isolate 0.305): 53.73,53.51 arc90 17.81,53.51 arc90 17.81,17.59 arc90 53.73,17.59 arc90
GND1  (via drill 0.38)
  Top 0.203: U6.2 v86.78,48.12 85.26,49.65 85.26,50.19 C15.1 | U7.2 v89.48,25.67 | C11.1 89.75,43.36 89.75,43.08 U4.43 | U4.15 81.58,33.52 81.58,33.39 | U4.23 89.03,33.42 89.03,33.12 v88.58,32.67 | U4.5 84.26,42.37 v84.26,42.63 | U4.33 92.24,37.16 92.35,37.16 92.8,37.62 v92.8,37.97 | U4.35 91.98,39.77 v93.34,39.77
  Bottom 0.203: -1.1 94.87,15.52 94.87,18.49
  other vias: 77.71,46.42 99.36,22.98 102.95,30.16 83.19,21.18 81.4,49.92 76.91,26.57 80.5,43.63 83.91,51 71.52,45.43 80.5,32.85 78.88,34.47 93.07,46.86 89.93,44.98 93.25,32.85 99.81,33.3 87.86,51.71 73.31,32.85 80.5,54.41 104.75,42.73
  pour Top (isolate 0.305): 108.34,53.51 arc90 72.42,53.51 arc90 72.42,17.59 arc90 108.34,17.59 arc90
  pour Bottom (isolate 0.305): 108.34,53.51 arc90 72.42,53.51 arc90 72.42,17.59 arc90 108.34,17.59 arc90
GND2  (via drill 0.38)
  Top 0.203: U10.2 v86.78,102.73 85.26,104.26 85.26,104.8 C23.1 | U11.2 v89.48,80.28 | C19.1 89.75,97.97 89.75,97.69 U9.43 | U9.15 81.58,88.13 81.58,88 | U9.23 89.03,88.03 89.03,87.73 v88.58,87.28 | U9.5 84.26,96.98 v84.26,97.24 | U9.33 92.24,91.78 92.35,91.78 92.8,92.22 v92.8,92.58 | U9.35 91.98,94.38 v93.34,94.38
  Bottom 0.203: -2.1 94.87,70.13 94.87,73.1
  other vias: 77.71,101.03 99.36,77.59 102.95,84.77 83.19,75.79 81.4,104.53 76.91,81.18 80.5,98.24 83.91,105.61 71.52,100.04 80.5,87.46 78.88,89.08 93.07,101.47 89.93,99.59 93.25,87.46 99.81,87.91 87.86,106.32 73.31,87.46 80.5,109.02 104.75,97.34
  pour Top (isolate 0.305): 108.34,108.12 arc90 72.42,108.12 arc90 72.42,72.2 arc90 108.34,72.2 arc90
  pour Bottom (isolate 0.305): 108.34,108.12 arc90 72.42,108.12 arc90 72.42,72.2 arc90 108.34,72.2 arc90
GND3  (via drill 0.38)
  Top 0.203: U14.2 v32.17,102.73 30.65,104.26 30.65,104.8 C31.1 | U15.2 v34.87,80.28 | C27.1 35.14,97.97 35.14,97.69 U13.43 | U13.15 26.97,88.13 26.97,88 | U13.23 34.42,88.03 34.42,87.73 v33.97,87.28 | U13.5 29.65,96.98 v29.65,97.24 | U13.33 37.63,91.78 37.74,91.78 38.19,92.22 v38.19,92.58 | U13.35 37.37,94.38 v38.73,94.38
  Bottom 0.203: -3.1 40.26,70.13 40.26,73.1
  other vias: 23.1,101.03 44.75,77.59 48.34,84.77 28.58,75.79 26.79,104.53 22.3,81.18 25.89,98.24 29.3,105.61 16.91,100.04 25.89,87.46 24.27,89.08 38.46,101.47 35.32,99.59 38.64,87.46 45.2,87.91 33.25,106.32 18.7,87.46 25.89,109.02 50.14,97.34
  pour Top (isolate 0.305): 53.73,108.12 arc90 17.81,108.12 arc90 17.81,72.2 arc90 53.73,72.2 arc90
  pour Bottom (isolate 0.305): 53.73,108.12 arc90 17.81,108.12 arc90 17.81,72.2 arc90 53.73,72.2 arc90
MISO  (via drill 0.38)
  Top 0.203: v25.71,36.09 25.71,36.27 27.59,38.15 27.59,38.33 28.49,39.23 28.61,39.23 U3.11
  Bottom 0.203: 24.45,36.09 21.31,39.23 v21.31,41.03 | 24.45,36.09 | 24.45,36.09 v25.71,36.09
MISO1  (via drill 0.38)
  Top 0.203: v80.32,36.09 80.32,36.27 82.2,38.15 82.2,38.33 83.1,39.23 83.22,39.23 U4.11
  Bottom 0.203: 79.06,36.09 75.92,39.23 v75.92,41.03 | 79.06,36.09 | 79.06,36.09 v80.32,36.09
MISO2  (via drill 0.38)
  Top 0.203: v80.32,90.7 80.32,90.88 82.2,92.76 82.2,92.94 83.1,93.84 83.22,93.84 U9.11
  Bottom 0.203: 79.06,90.7 75.92,93.84 v75.92,95.64 | 79.06,90.7 | 79.06,90.7 v80.32,90.7
MISO3  (via drill 0.38)
  Top 0.203: v25.71,90.7 25.71,90.88 27.59,92.76 27.59,92.94 28.49,93.84 28.61,93.84 U13.11
  Bottom 0.203: 24.45,90.7 21.31,93.84 v21.31,95.64 | 24.45,90.7 | 24.45,90.7 v25.71,90.7
MOSI  (via drill 0.38)
  Top 0.203: U3.10 28.78,39.77 28.31,39.77 27.24,38.69 26.88,38.69 v26.34,39.23
  Bottom 0.203: v21.31,44.62 21.4,43.09 25.26,39.23 v26.34,39.23
MOSI1  (via drill 0.38)
  Top 0.203: U4.10 83.39,39.77 82.92,39.77 81.85,38.69 81.49,38.69 v80.95,39.23
  Bottom 0.203: v75.92,44.62 76.01,43.09 79.87,39.23 v80.95,39.23
MOSI2  (via drill 0.38)
  Top 0.203: U9.10 83.39,94.38 82.92,94.38 81.85,93.3 81.49,93.3 v80.95,93.84
  Bottom 0.203: v75.92,99.23 76.01,97.7 79.87,93.84 v80.95,93.84
MOSI3  (via drill 0.38)
  Top 0.203: U13.10 28.78,94.38 28.31,94.38 27.24,93.3 26.88,93.3 v26.34,93.84
  Bottom 0.203: v21.31,99.23 21.4,97.7 25.26,93.84 v26.34,93.84
N$1
  Top 0.203: LED2.C 24.35,41.54 R6.1
N$2
  Top 0.203: U2.3 35.86,28.01 36.04,28.18 38.1,28.18 41.16,31.24 41.16,34.65 43.67,37.16 43.67,38.42 42.05,40.04 42.05,41.84 S1.2
N$3
  Top 0.203: R1.1 LED1.A
N$4
  Top 0.203: U1.1 34.64,47.49 36.38,47.49 LED1.C
N$5
  Top 0.203: Y1.1 30.2,31.88 30.2,33.21 29.48,33.93 29.48,34.65 | U3.17 29.48,34.65 | 29.48,34.65
N$6
  Top 0.203: R2.2 arc90 30.94,45.55 U1.5
N$7
  Top 0.203: Y1.3 28.58,33.65 28.58,34.46 U3.16
N$8
  Top 0.203: U2.4 32.42,26.28
  Top 0.254: 32.42,26.28 C1.1
N$9  (via drill 0.38)
  Top 0.203: U3.12 28.25,36.9 v27.77,36.9
  Bottom 0.203: v27.77,36.9 28.25,36.9 33.07,41.72 33.07,49.02 30.12,51.97 D11.1
N$10  (via drill 0.38)
  Top 0.203: v42.05,38.24 40.71,39.59 40.71,42.28 39.36,43.63 v39.36,44.53 | U3.30 38.05,34.65 v38.46,34.65
  Bottom 0.203: v38.46,34.65 v42.05,38.24 | v39.36,44.53 39.36,51.71 41.42,53.77 D10.1
N$11  (via drill 0.38)
  Top 0.203: U3.29 37.56,34.46 v37.56,33.75
  Bottom 0.203: v37.56,33.75 37.56,35.73 42.05,40.22 42.05,41.84 D9.1
N$12  (via drill 0.38)
  Top 0.203: v34.06,30.07 34.51,29.62 35.23,29.62 35.77,30.16 37.56,30.16 39.72,32.32 v39.72,33.93 | v50.13,39.14 51.93,37.34 51.93,31.96 53.99,29.9 D5.1 | U3.19 30.83,34.61 30.83,34.2 32,33.03 v32,32.5
  Bottom 0.203: v39.72,33.93 44.93,39.14 v50.13,39.14 | v32,32.5 34.06,30.43 v34.06,30.07
N$13  (via drill 0.38)
  Top 0.203: v33.16,29.17 33.61,28.72 37.92,28.72 40.08,30.88 v40.08,31.42 | U3.18 30.29,34.75 30.29,33.84 31.01,33.12 v31.01,31.51
  Bottom 0.203: D6.1 53.99,41.2 50.13,37.34 46.54,37.34 41.16,31.96 40.62,31.96 v40.08,31.42 | v31.01,31.51 33.16,29.35 v33.16,29.17
N$14  (via drill 0.38)
  Top 0.203: v29.21,26.48 31.28,24.41 31.28,14.89 30.75,14.37 A5.1 | U3.41 37.02,43.58 v37.02,45.07
  Bottom 0.203: v29.21,26.48 29.93,27.2 30.29,27.2 31.28,26.21 31.64,26.21 35.32,29.89 35.32,30.25 34.87,30.7 34.87,42.91 v37.02,45.07
N$15  (via drill 0.38)
  Top 0.203: U3.40 36.05,41.92 36.86,42.73 v37.56,42.73
  Bottom 0.203: A4.1 25.53,25.31 29.3,25.31 30.2,24.41 30.74,24.41 36.22,29.89 36.22,30.07 35.5,30.79 35.5,31.51 35.59,39.68 35.59,39.69 35.59,41.47 36.86,42.73 v37.56,42.73
N$16  (via drill 0.38)
  Top 0.203: v26.25,24.23 26.25,25.31 20.5,31.06 15.74,31.06 A3.1 | U3.39 36.66,41.84 v38.46,41.84
  Bottom 0.203: v26.25,24.23 29.12,24.23 29.66,23.7 30.74,23.7 36.93,29.89 36.93,30.07 36.13,30.88 36.13,39.5 v38.46,41.84
N$17  (via drill 0.38)
  Top 0.203: U3.38 36.47,40.94 v39.36,40.94 | v28.58,22.98 27.41,24.14 27.41,25.04 21.31,31.15 21.31,31.87 18.7,34.47 18.7,38.24 15.75,41.2 A2.1 14.58,41.11
  Bottom 0.203: v28.58,22.98 30.92,22.98 37.65,29.71 37.65,30.07 36.66,31.06 36.66,39.32 38.28,40.94 v39.36,40.94
N$18
  Top 0.203: R8.1 41.47,36.99 LED4.A
N$19
  Top 0.203: R5.2 24.99,49.02 23.22,49.02 U5.D-1
N$20
  Top 0.203: R4.2 23.73,48.12 23.2,48.12 U5.D+1
N$21
  Top 0.203: LED3.C 22.55,39.74 R7.1
N$22
  Top 0.203: U7.3 90.47,28.01 90.65,28.18 92.71,28.18 95.77,31.24 95.77,34.65 98.28,37.16 98.28,38.42 96.66,40.04 96.66,41.84 S3.2
N$23
  Top 0.203: R9.1 LED5.A
N$24
  Top 0.203: U6.1 89.25,47.49 90.99,47.49 LED5.C
N$25
  Top 0.203: R10.2 arc90 85.55,45.55 U6.5
N$26
  Top 0.203: U7.4 87.03,26.28
  Top 0.254: 87.03,26.28 C9.1
N$27  (via drill 0.38)
  Top 0.203: U4.12 82.86,36.9 v82.39,36.9
  Bottom 0.203: v82.39,36.9 82.86,36.9 87.68,41.72 87.68,49.02 84.73,51.97 D8.1
N$28  (via drill 0.38)
  Top 0.203: v96.66,38.24 95.32,39.59 95.32,42.28 93.97,43.63 v93.97,44.53 | U4.30 92.66,34.65 v93.07,34.65
  Bottom 0.203: v93.07,34.65 v96.66,38.24 | v93.97,44.53 93.97,51.71 96.03,53.77 D7.1
N$29  (via drill 0.38)
  Top 0.203: U4.29 92.17,34.46 v92.17,33.75
  Bottom 0.203: v92.17,33.75 92.17,35.73 96.66,40.22 96.66,41.84 D3.1
N$30  (via drill 0.38)
  Top 0.203: v83.82,26.48 85.89,24.41 85.89,14.89 85.36,14.37 A7.1 | U4.41 91.63,43.58 v91.63,45.07
  Bottom 0.203: v83.82,26.48 84.54,27.2 84.9,27.2 85.89,26.21 86.25,26.21 89.93,29.89 89.93,30.25 89.48,30.7 89.48,42.91 v91.63,45.07
N$31  (via drill 0.38)
  Top 0.203: U4.40 90.66,41.92 91.47,42.73 v92.17,42.73
  Bottom 0.203: A8.1 80.14,25.31 83.91,25.31 84.81,24.41 85.35,24.41 90.83,29.89 90.83,30.07 90.11,30.79 90.11,31.51 90.2,39.68 90.2,39.69 90.2,41.47 91.47,42.73 v92.17,42.73
N$32  (via drill 0.38)
  Top 0.203: v80.86,24.23 80.86,25.31 75.11,31.06 70.35,31.06 A6.1 | U4.39 91.28,41.84 v93.07,41.84
  Bottom 0.203: v80.86,24.23 83.73,24.23 84.27,23.7 85.35,23.7 91.54,29.89 91.54,30.07 90.74,30.88 90.74,39.5 v93.07,41.84
N$33  (via drill 0.38)
  Top 0.203: U4.38 91.08,40.94 v93.97,40.94 | v83.19,22.98 82.03,24.14 82.03,25.04 75.92,31.15 75.92,31.87 73.31,34.47 73.31,38.24 70.36,41.2 A1.1 69.19,41.11
  Bottom 0.203: v83.19,22.98 85.53,22.98 92.26,29.71 92.26,30.07 91.28,31.06 91.28,39.32 92.89,40.94 v93.97,40.94
N$34
  Top 0.203: R13.2 79.6,49.02 77.83,49.02 U8.D-1
N$35
  Top 0.203: R12.2 78.34,48.12 77.81,48.12 U8.D+1
N$36
  Top 0.203: LED6.C 78.96,41.54 R14.1
N$37
  Top 0.203: LED7.C 77.17,39.74 R15.1
N$38
  Top 0.203: Y2.1 84.81,31.88 84.81,33.21 84.09,33.93 84.09,34.65 | U4.17 84.09,34.65 | 84.09,34.65
N$39
  Top 0.203: Y2.3 83.19,33.65 83.19,34.46 U4.16
N$40  (via drill 0.38)
  Top 0.203: v88.67,30.07 89.12,29.62 89.84,29.62 90.38,30.16 92.17,30.16 94.33,32.32 v94.33,33.93 | v104.75,39.14 106.54,37.34 106.54,31.96 108.6,29.9 D2.1 | U4.19 85.44,34.61 85.44,34.2 86.61,33.03 v86.61,32.5
  Bottom 0.203: v94.33,33.93 99.54,39.14 v104.75,39.14 | v86.61,32.5 88.67,30.43 v88.67,30.07
N$41  (via drill 0.38)
  Top 0.203: v87.77,29.17 88.22,28.72 92.53,28.72 94.69,30.88 v94.69,31.42 | U4.18 84.9,34.75 84.9,33.84 85.62,33.12 v85.62,31.51
  Bottom 0.203: D4.1 108.6,41.2 104.75,37.34 101.15,37.34 95.77,31.96 95.23,31.96 v94.69,31.42 | v85.62,31.51 87.77,29.35 v87.77,29.17
N$42
  Top 0.203: R16.1 96.08,36.99 LED8.A
N$43
  Top 0.203: U11.3 90.47,82.62 90.65,82.8 92.71,82.8 95.77,85.85 95.77,89.26 98.28,91.78 98.28,93.03 96.66,94.65 96.66,96.44 S5.2
N$44
  Top 0.203: R17.1 LED9.A
N$45
  Top 0.203: U10.1 89.25,102.1 90.99,102.1 LED9.C
N$46
  Top 0.203: R18.2 arc90 85.55,100.16 U10.5
N$47
  Top 0.203: U11.4 87.03,80.89
  Top 0.254: 87.03,80.89 C17.1
N$48  (via drill 0.38)
  Top 0.203: U9.12 82.86,91.51 v82.39,91.51
  Bottom 0.203: v82.39,91.51 82.86,91.51 87.68,96.33 87.68,103.63 84.73,106.58 D17.1
N$49  (via drill 0.38)
  Top 0.203: v96.66,92.85 95.32,94.2 95.32,96.89 93.97,98.24 v93.97,99.14 | U9.30 92.66,89.26 v93.07,89.26
  Bottom 0.203: v93.07,89.26 v96.66,92.85 | v93.97,99.14 93.97,106.32 96.03,108.38 D16.1
N$50  (via drill 0.38)
  Top 0.203: U9.29 92.17,89.07 v92.17,88.36
  Bottom 0.203: v92.17,88.36 92.17,90.34 96.66,94.83 96.66,96.44 D14.1
N$51  (via drill 0.38)
  Top 0.203: v83.82,81.09 85.89,79.02 85.89,69.5 85.36,68.97 A11.1 | U9.41 91.63,98.19 v91.63,99.68
  Bottom 0.203: v83.82,81.09 84.54,81.81 84.9,81.81 85.89,80.82 86.25,80.82 89.93,84.5 89.93,84.86 89.48,85.31 89.48,97.52 v91.63,99.68
N$52  (via drill 0.38)
  Top 0.203: U9.40 90.66,96.53 91.47,97.34 v92.17,97.34
  Bottom 0.203: A12.1 80.14,79.92 83.91,79.92 84.81,79.02 85.35,79.02 90.83,84.5 90.83,84.68 90.11,85.4 90.11,86.12 90.2,94.29 90.2,94.3 90.2,96.08 91.47,97.34 v92.17,97.34
N$53  (via drill 0.38)
  Top 0.203: v80.86,78.84 80.86,79.92 75.11,85.67 70.35,85.67 A10.1 | U9.39 91.28,96.44 v93.07,96.44
  Bottom 0.203: v80.86,78.84 83.73,78.84 84.27,78.31 85.35,78.31 91.54,84.5 91.54,84.68 90.74,85.49 90.74,94.11 v93.07,96.44
N$54  (via drill 0.38)
  Top 0.203: U9.38 91.08,95.55 v93.97,95.55 | v83.19,77.59 82.03,78.75 82.03,79.65 75.92,85.76 75.92,86.48 73.31,89.08 73.31,92.85 70.36,95.81 A9.1 69.19,95.72
  Bottom 0.203: v83.19,77.59 85.53,77.59 92.26,84.32 92.26,84.68 91.28,85.67 91.28,93.93 92.89,95.55 v93.97,95.55
N$55
  Top 0.203: R21.2 79.6,103.63 77.83,103.63 U12.D-1
N$56
  Top 0.203: R20.2 78.34,102.73 77.81,102.73 U12.D+1
N$57
  Top 0.203: LED10.C 78.96,96.15 R22.1
N$58
  Top 0.203: LED11.C 77.17,94.35 R23.1
N$59
  Top 0.203: Y3.1 84.81,86.49 84.81,87.82 84.09,88.54 84.09,89.26 | U9.17 84.09,89.26 | 84.09,89.26
N$60
  Top 0.203: Y3.3 83.19,88.26 83.19,89.07 U9.16
N$61  (via drill 0.38)
  Top 0.203: v88.67,84.68 89.12,84.23 89.84,84.23 90.38,84.77 92.17,84.77 94.33,86.93 v94.33,88.54 | v104.75,93.75 106.54,91.95 106.54,86.57 108.6,84.51 D13.1 | U9.19 85.44,89.22 85.44,88.81 86.61,87.64 v86.61,87.11
  Bottom 0.203: v94.33,88.54 99.54,93.75 v104.75,93.75 | v86.61,87.11 88.67,85.04 v88.67,84.68
N$62  (via drill 0.38)
  Top 0.203: v87.77,83.78 88.22,83.33 92.53,83.33 94.69,85.49 v94.69,86.03 | U9.18 84.9,89.36 84.9,88.45 85.62,87.73 v85.62,86.12
  Bottom 0.203: D15.1 108.6,95.81 104.75,91.95 101.15,91.95 95.77,86.57 95.23,86.57 v94.69,86.03 | v85.62,86.12 87.77,83.96 v87.77,83.78
N$63
  Top 0.203: R24.1 96.08,91.6 LED12.A
N$64
  Top 0.203: U15.3 35.86,82.62 36.04,82.8 38.1,82.8 41.16,85.85 41.16,89.26 43.67,91.78 43.67,93.03 42.05,94.65 42.05,96.44 S7.2
N$65
  Top 0.203: R25.1 LED13.A
N$66
  Top 0.203: U14.1 34.64,102.1 36.38,102.1 LED13.C
N$67
  Top 0.203: R26.2 arc90 30.94,100.16 U14.5
N$68
  Top 0.203: U15.4 32.42,80.89
  Top 0.254: 32.42,80.89 C25.1
N$69  (via drill 0.38)
  Top 0.203: U13.12 28.25,91.51 v27.77,91.51
  Bottom 0.203: v27.77,91.51 28.25,91.51 33.07,96.33 33.07,103.63 30.12,106.58 D23.1
N$70  (via drill 0.38)
  Top 0.203: v42.05,92.85 40.71,94.2 40.71,96.89 39.36,98.24 v39.36,99.14 | U13.30 38.05,89.26 v38.46,89.26
  Bottom 0.203: v38.46,89.26 v42.05,92.85 | v39.36,99.14 39.36,106.32 41.42,108.38 D22.1
N$71  (via drill 0.38)
  Top 0.203: U13.29 37.56,89.07 v37.56,88.36
  Bottom 0.203: v37.56,88.36 37.56,90.34 42.05,94.83 42.05,96.44 D20.1
N$72  (via drill 0.38)
  Top 0.203: v29.21,81.09 31.28,79.02 31.28,69.5 30.75,68.97 A15.1 | U13.41 37.02,98.19 v37.02,99.68
  Bottom 0.203: v29.21,81.09 29.93,81.81 30.29,81.81 31.28,80.82 31.64,80.82 35.32,84.5 35.32,84.86 34.87,85.31 34.87,97.52 v37.02,99.68
N$73  (via drill 0.38)
  Top 0.203: U13.40 36.05,96.53 36.86,97.34 v37.56,97.34
  Bottom 0.203: A16.1 25.53,79.92 29.3,79.92 30.2,79.02 30.74,79.02 36.22,84.5 36.22,84.68 35.5,85.4 35.5,86.12 35.59,94.29 35.59,94.3 35.59,96.08 36.86,97.34 v37.56,97.34
N$74  (via drill 0.38)
  Top 0.203: v26.25,78.84 26.25,79.92 20.5,85.67 15.74,85.67 A14.1 | U13.39 36.66,96.44 v38.46,96.44
  Bottom 0.203: v26.25,78.84 29.12,78.84 29.66,78.31 30.74,78.31 36.93,84.5 36.93,84.68 36.13,85.49 36.13,94.11 v38.46,96.44
N$75  (via drill 0.38)
  Top 0.203: U13.38 36.47,95.55 v39.36,95.55 | v28.58,77.59 27.41,78.75 27.41,79.65 21.31,85.76 21.31,86.48 18.7,89.08 18.7,92.85 15.75,95.81 A13.1 14.58,95.72
  Bottom 0.203: v28.58,77.59 30.92,77.59 37.65,84.32 37.65,84.68 36.66,85.67 36.66,93.93 38.28,95.55 v39.36,95.55
N$76
  Top 0.203: R29.2 24.99,103.63 23.22,103.63 U16.D-1
N$77
  Top 0.203: R28.2 23.73,102.73 23.2,102.73 U16.D+1
N$78
  Top 0.203: LED14.C 24.35,96.15 R30.1
N$79
  Top 0.203: LED15.C 22.55,94.35 R31.1
N$80
  Top 0.203: Y4.1 30.2,86.49 30.2,87.82 29.48,88.54 29.48,89.26 | U13.17 29.48,89.26 | 29.48,89.26
N$81
  Top 0.203: Y4.3 28.58,88.26 28.58,89.07 U13.16
N$82  (via drill 0.38)
  Top 0.203: v34.06,84.68 34.51,84.23 35.23,84.23 35.77,84.77 37.56,84.77 39.72,86.93 v39.72,88.54 | v50.13,93.75 51.93,91.95 51.93,86.57 53.99,84.51 D19.1 | U13.19 30.83,89.22 30.83,88.81 32,87.64 v32,87.11
  Bottom 0.203: v39.72,88.54 44.93,93.75 v50.13,93.75 | v32,87.11 34.06,85.04 v34.06,84.68
N$83  (via drill 0.38)
  Top 0.203: v33.16,83.78 33.61,83.33 37.92,83.33 40.08,85.49 v40.08,86.03 | U13.18 30.29,89.36 30.29,88.45 31.01,87.73 v31.01,86.12
  Bottom 0.203: D21.1 53.99,95.81 50.13,91.95 46.54,91.95 41.16,86.57 40.62,86.57 v40.08,86.03 | v31.01,86.12 33.16,83.96 v33.16,83.78
N$84
  Top 0.203: R32.1 41.47,91.6 LED16.A
RESET  (via drill 0.38)
  Top 0.203: v26.61,35.19 27.19,35.19 27.25,35.19 U3.13 | v22.84,44.17 18.97,40.31 18.97,39.05 R3.2 20.11,37.86 19.6,37.34 19.6,35.55 v22.3,32.85 | S2.3 25.89,28.9 v25.89,29.26
  Bottom 0.203: v22.84,44.17 23.82,45.16 24.36,45.16 v24.9,44.62 | v26.61,35.19 24.27,32.85 v22.3,32.85 | v25.89,29.26 v22.3,32.85 | v22.3,32.85
RESET1  (via drill 0.38)
  Top 0.203: v81.22,35.19 81.8,35.19 81.86,35.19 U4.13 | v77.44,44.17 73.58,40.31 73.58,39.05 R11.2 74.72,37.86 74.21,37.34 74.21,35.55 v76.91,32.85 | S4.3 80.5,28.9 v80.5,29.26
  Bottom 0.203: v77.44,44.17 78.43,45.16 78.97,45.16 v79.51,44.62 | v81.22,35.19 78.88,32.85 v76.91,32.85 | v80.5,29.26 v76.91,32.85 | v76.91,32.85
RESET2  (via drill 0.38)
  Top 0.203: v81.22,89.8 81.8,89.8 81.86,89.8 U9.13 | v77.44,98.78 73.58,94.92 73.58,93.66 R19.2 74.72,92.47 74.21,91.95 74.21,90.16 v76.91,87.47 | S6.3 80.5,83.51 v80.5,83.87
  Bottom 0.203: v77.44,98.78 78.43,99.77 78.97,99.77 v79.51,99.23 | v81.22,89.8 78.88,87.47 v76.91,87.47 | v80.5,83.87 v76.91,87.47 | v76.91,87.47
RESET3  (via drill 0.38)
  Top 0.203: v26.61,89.8 27.19,89.8 27.25,89.8 U13.13 | v22.84,98.78 18.97,94.92 18.97,93.66 R27.2 20.11,92.47 19.6,91.95 19.6,90.16 v22.3,87.47 | S8.3 25.89,83.51 v25.89,83.87
  Bottom 0.203: v22.84,98.78 23.82,99.77 24.36,99.77 v24.9,99.23 | v26.61,89.8 24.27,87.47 v22.3,87.47 | v25.89,83.87 v22.3,87.47 | v22.3,87.47
RX_LED
  Top 0.203: U3.8 29.17,40.76 28.04,40.76 27.68,41.12 26.43,41.12 25.65,40.34 R6.2
RX_LED1
  Top 0.203: U4.8 83.78,40.76 82.65,40.76 82.3,41.12 81.04,41.12 80.26,40.34 R14.2
RX_LED2
  Top 0.203: U9.8 83.78,95.37 82.65,95.37 82.3,95.73 81.04,95.73 80.26,94.95 R22.2
RX_LED3
  Top 0.203: U13.8 29.17,95.37 28.04,95.37 27.68,95.73 26.43,95.73 25.65,94.95 R30.2
SCK  (via drill 0.38)
  Top 0.203: U3.9 29.01,40.22 v27.33,40.22
  Bottom 0.203: v23.11,42.82 25.35,40.58 25.71,40.22 v27.33,40.22
SCK1  (via drill 0.38)
  Top 0.203: U4.9 83.62,40.22 v81.94,40.22
  Bottom 0.203: v77.72,42.82 79.96,40.58 80.32,40.22 v81.94,40.22
SCK2  (via drill 0.38)
  Top 0.203: U9.9 83.62,94.83 v81.94,94.83
  Bottom 0.203: v77.72,97.43 79.96,95.19 80.32,94.83 v81.94,94.83
SCK3  (via drill 0.38)
  Top 0.203: U13.9 29.01,94.83 v27.33,94.83
  Bottom 0.203: v23.11,97.43 25.35,95.19 25.71,94.83 v27.33,94.83
TX_LED  (via drill 0.38)
  Top 0.203: v24.72,37.62 R7.2 | v29.48,29.26 30.38,30.16 30.92,30.16 32.98,32.23 32.98,32.77 32.09,33.66 32.09,33.78 U3.22
  Bottom 0.203: v24.72,37.62 25.26,37.08 26.16,37.08 27.5,35.73 27.5,31.24 v29.48,29.26
TX_LED1  (via drill 0.38)
  Top 0.203: v79.33,37.62 R15.2 | v84.09,29.26 84.99,30.16 85.53,30.16 87.59,32.23 87.59,32.77 86.69,33.66 86.69,33.78 U4.22
  Bottom 0.203: v79.33,37.62 79.87,37.08 80.77,37.08 82.11,35.73 82.11,31.24 v84.09,29.26
TX_LED2  (via drill 0.38)
  Top 0.203: v79.33,92.22 R23.2 | v84.09,83.87 84.99,84.77 85.53,84.77 87.59,86.84 87.59,87.38 86.69,88.27 86.69,88.39 U9.22
  Bottom 0.203: v79.33,92.22 79.87,91.69 80.77,91.69 82.11,90.34 82.11,85.85 v84.09,83.87
TX_LED3  (via drill 0.38)
  Top 0.203: v24.72,92.22 R31.2 | v29.48,83.87 30.38,84.77 30.92,84.77 32.98,86.84 32.98,87.38 32.09,88.27 32.09,88.39 U13.22
  Bottom 0.203: v24.72,92.22 25.26,91.69 26.16,91.69 27.5,90.34 27.5,85.85 v29.48,83.87
USER_LED
  Top 0.203: R8.2 38.43,36.36 37.73,36.36 U3.32
USER_LED1
  Top 0.203: R16.2 93.04,36.36 92.34,36.36 U4.32
USER_LED2
  Top 0.203: R24.2 93.04,90.97 92.34,90.97 U9.32
USER_LED3
  Top 0.203: R32.2 38.43,90.97 37.73,90.97 U13.32
V_BATT  (via drill 0.51)
  Top 0.203: U1.3 33.17,50.46 33.43,50.46 v35.32,48.57 | v37.11,46.77 38.46,48.12 39.36,48.12 44.39,43.09 44.39,42.37 42.95,40.94 42.95,40.22 44.75,38.42 44.75,37.34 42.05,34.65 42.05,34.47 C8.2 41.96,32.77 41.96,31.33 38.65,28.02 38.65,27.66 JP1.2 38.1,23.36 38.1,20.64 D1.A
  Bottom 0.203: v35.32,48.57 v37.11,46.77
V_BATT1  (via drill 0.51)
  Top 0.203: U6.3 87.78,50.46 88.04,50.46 v89.93,48.57 | v91.72,46.77 93.07,48.12 93.97,48.12 99,43.09 99,42.37 97.56,40.94 97.56,40.22 99.36,38.42 99.36,37.34 96.66,34.65 96.66,34.47 C16.2 96.57,32.77 96.57,31.33 93.26,28.02 93.26,27.66 JP4.2 92.71,23.36 92.71,20.64 D12.A
  Bottom 0.203: v89.93,48.57 v91.72,46.77
V_BATT2  (via drill 0.51)
  Top 0.203: U10.3 87.78,105.07 88.04,105.07 v89.93,103.18 | v91.72,101.38 93.07,102.73 93.97,102.73 99,97.7 99,96.98 97.56,95.55 97.56,94.83 99.36,93.03 99.36,91.95 96.66,89.26 96.66,89.08 C24.2 96.57,87.38 96.57,85.94 93.26,82.63 93.26,82.27 JP7.2 92.71,77.97 92.71,75.25 D18.A
  Bottom 0.203: v89.93,103.18 v91.72,101.38
V_BATT3  (via drill 0.51)
  Top 0.203: U14.3 33.17,105.07 33.43,105.07 v35.32,103.18 | v37.11,101.38 38.46,102.73 39.36,102.73 44.39,97.7 44.39,96.98 42.95,95.55 42.95,94.83 44.75,93.03 44.75,91.95 42.05,89.26 42.05,89.08 C32.2 41.96,87.38 41.96,85.94 38.65,82.63 38.65,82.27 JP10.2 38.1,77.97 38.1,75.25 D24.A
  Bottom 0.203: v35.32,103.18 v37.11,101.38

## Text on the board
Bottom: v12 | v12 | v12 | v12
tPlace: 11 | 10 | 11 | 10 | CHG | CHG | 9 | 9 | CHG | CHG | ON | ON | A2 | 3 | A2 | 3 | RX | RX | TX | TX | STAT | STAT | RESET | RESET | A3 | 2 | A3 | 2 | A4 | A4 | + | + | A5 | - | A5 | - | 11 | 11 | 10 | 10 | CHG | 9 | CHG | 9 | CHG | CHG | ON | 3 | ON | 3 | A2 | A2 | RX | RX | TX | TX | STAT | STAT | RESET | RESET | A3 | 2 | A3 | 2 | A4 | + | A4 | + | A5 | A5 | - | -